# Altium PCB BCM_ECU_revA_V3.PcbDoc (part 2 of 7)
Units mm, origin at the board's own origin, x right, y up, seen from the top; angles counter-clockwise.
Board outline 109.5 x 156 mm, 4 copper layers (TOP SIG, GND, PWR, BOT SIG), stack 0.603 mm thick; 580 components, 446 nets, 1965 pads, 870 vias.
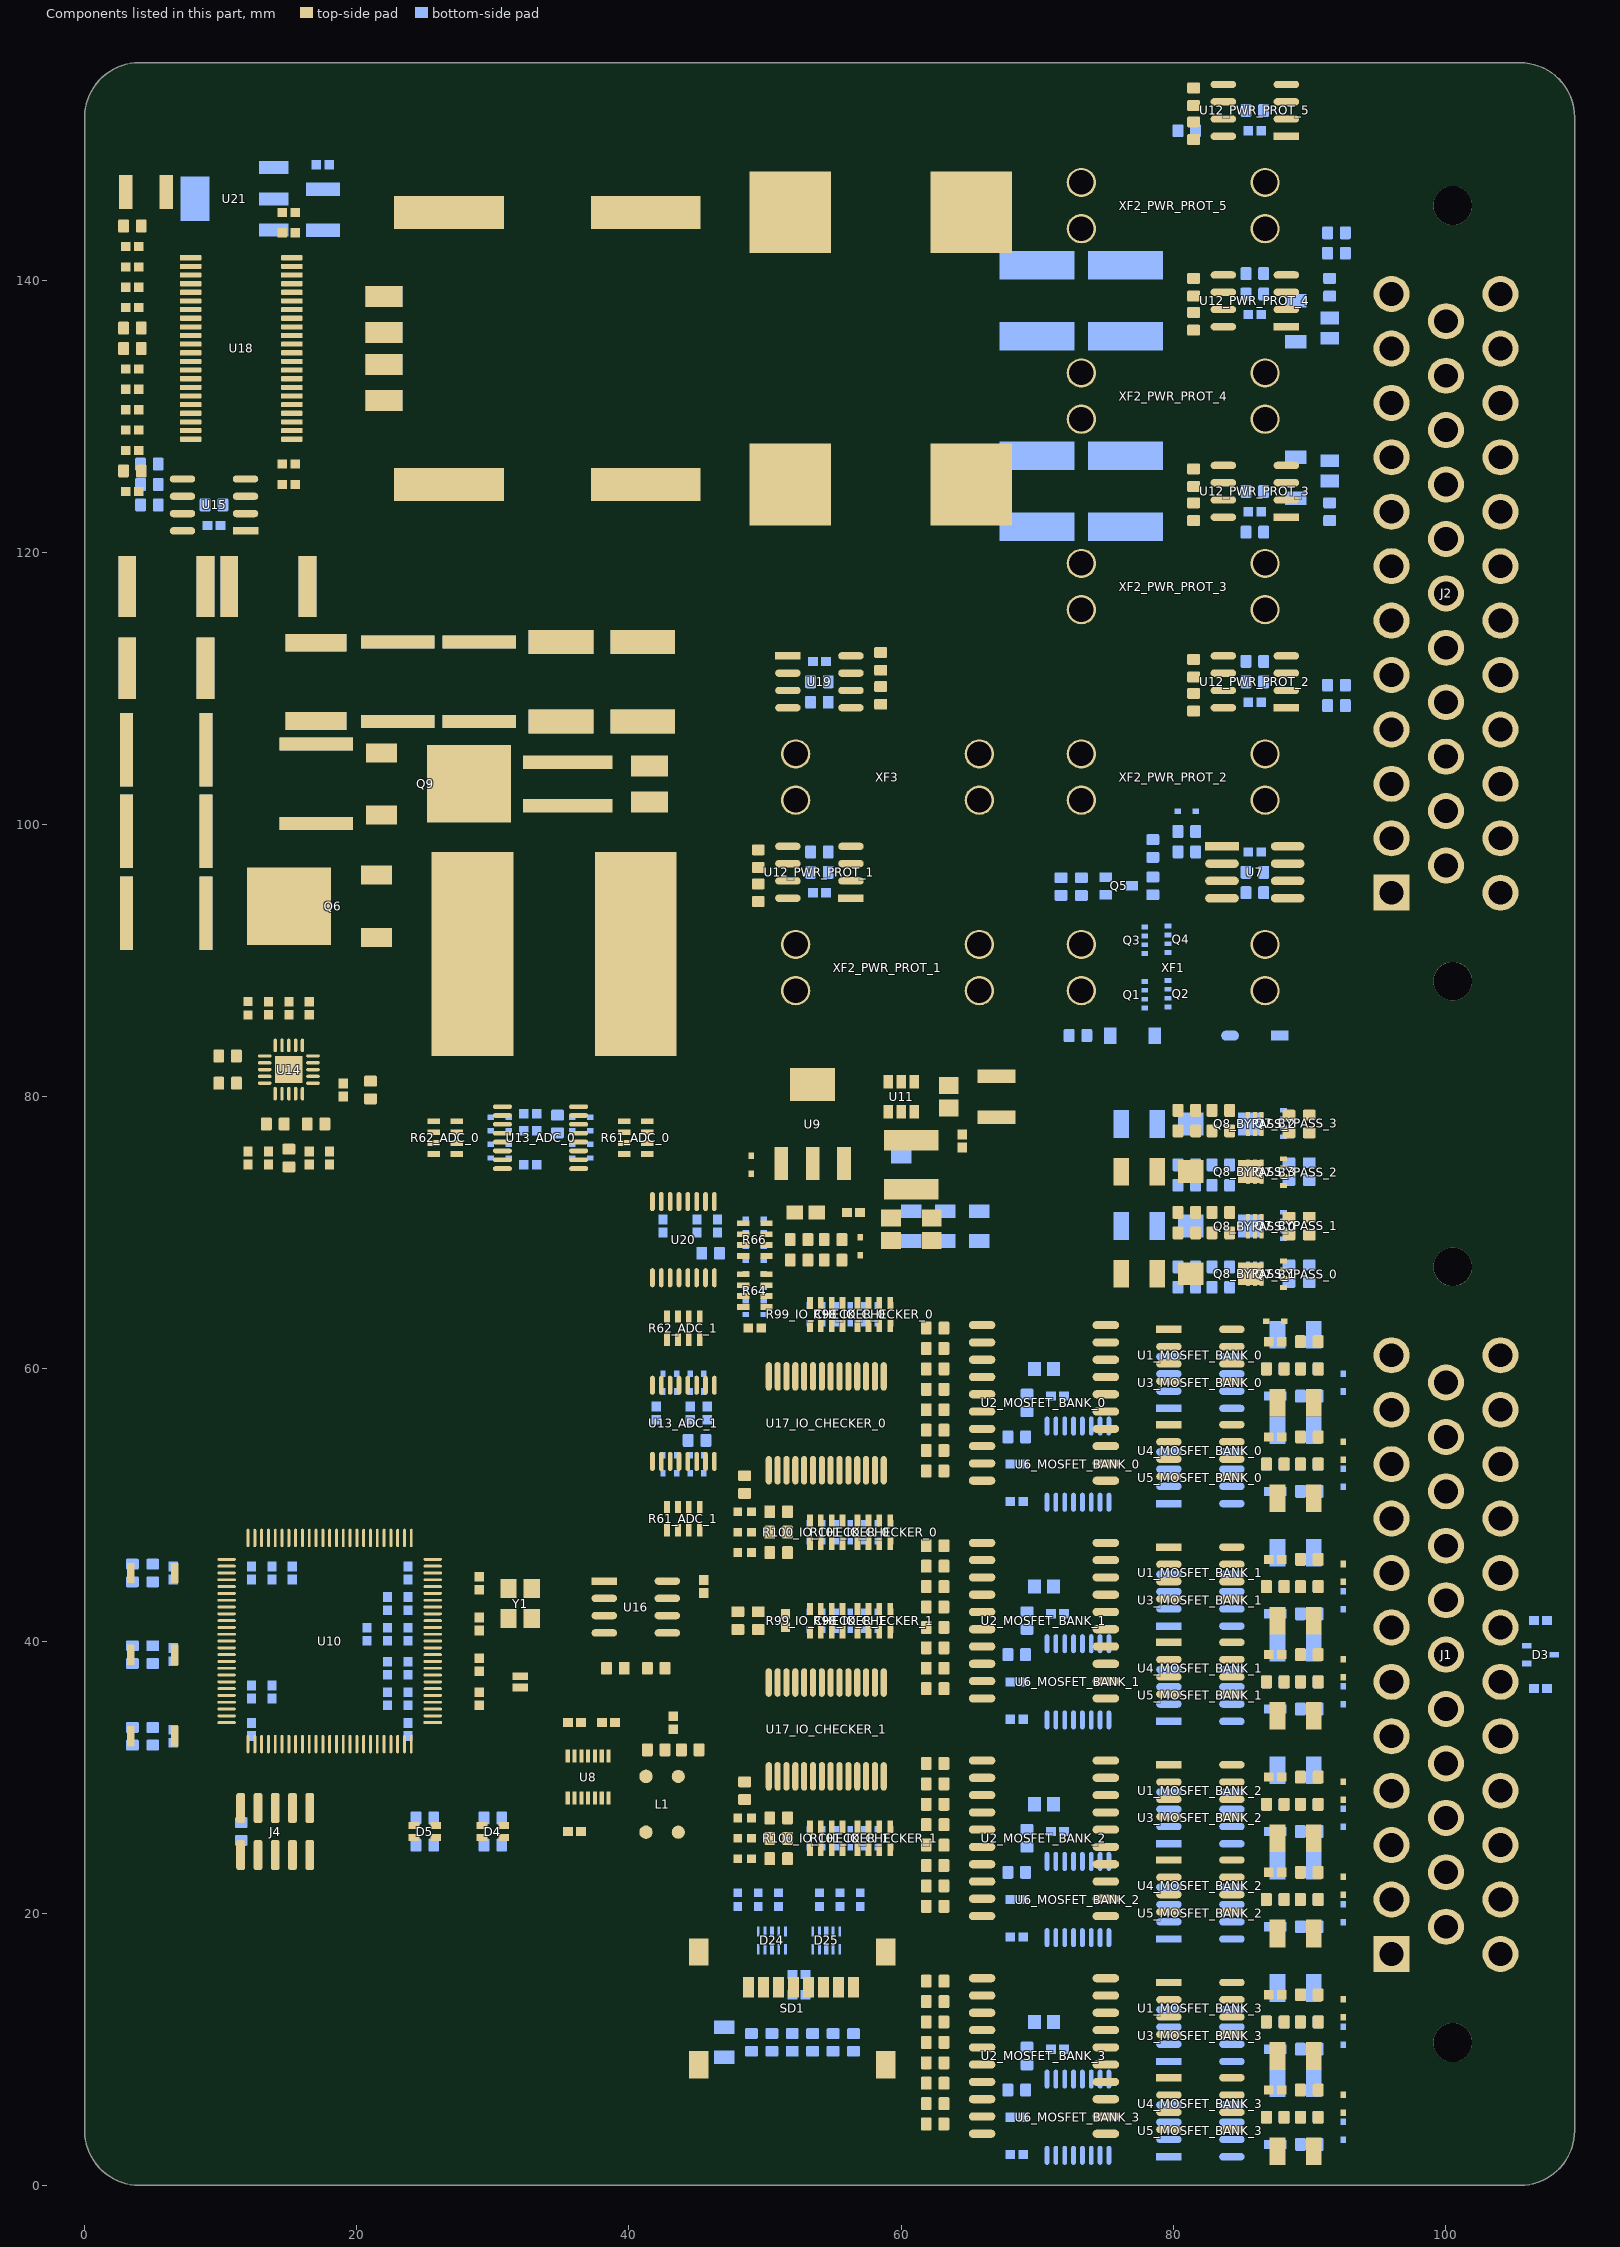
[diagram p4: the components of this part, seen from the top]

## Components (designator, comment, footprint, x,y, rotation, side; value= is the part's Value field where it differs from the comment) (continued)
R100_IO_CHECKER_1 "CAY16-102J4LF" BOUR-CAY16-J4_V 54.5,25.5 r90 top (schematic designator R100)
R101_IO_CHECKER_0 "CAY16-102J4LF" BOUR-CAY16-J4_V 58,48 r90 top (schematic designator R101)
R101_IO_CHECKER_1 "CAY16-102J4LF" BOUR-CAY16-J4_V 58,25.5 r90 top (schematic designator R101)
R102_IO_CHECKER_0 "DNP" RESC1005X40X25ML05T05 48.5,49.5 r0 top (schematic designator R102)
R102_IO_CHECKER_1 "DNP" RESC1005X40X25ML05T05 48.5,27 r0 top (schematic designator R102)
R103_IO_CHECKER_0 "DNP" RESC1005X40X25ML05T05 48.5,48 r0 top (schematic designator R103)
R103_IO_CHECKER_1 "DNP" RESC1005X40X25ML05T05 48.5,25.5 r0 top (schematic designator R103)
R104_IO_CHECKER_0 "DNP" RESC1005X40X25ML05T05 48.5,46.5 r0 top (schematic designator R104)
R104_IO_CHECKER_1 "DNP" RESC1005X40X25ML05T05 48.5,24 r0 top (schematic designator R104)
R105 "100k" R0603B 4.75,126.5 r180 bottom value=330
R106 "5.1k" R0603B 4.75,125 r0 bottom value=330
R107 "DNP" R0603B 54,110.5 r0 bottom value=10k
R108 "1k" R0603B 54,109 r0 bottom
R109 "100k" R0603B 58.5,112 r270 top value=10k
R110 "24k" R0603B 58.5,109.5 r270 top value=2.7k
R111 "1k" R0603B 4.75,123.5 r0 bottom
R112 "0402 JUMPER" RESC1005X40X25ML05T05 55.5,21 r270 bottom
R113 "0402 JUMPER" RESC1005X40X25ML05T05 57,21 r270 bottom
R114 "0402 JUMPER" RESC1005X40X25ML05T05 48,21 r270 bottom
R115 "0402 JUMPER" RESC1005X40X25ML05T05 49.5,21 r270 bottom
R116 "100k" R0603B 53.5,10.5 r270 bottom value=10k
R117 "0402 JUMPER" RESC1005X40X25ML05T05 54,21 r270 bottom
R118 "0402 JUMPER" RESC1005X40X25ML05T05 51,21 r270 bottom
R119 "100k" R0603B 52,10.5 r270 bottom value=10k
R120 "100k" R0603B 55,10.5 r270 bottom value=10k
R121_IO_CHECKER_0 "100k" R0603B 48.5,51.5 r270 top (schematic designator R121)
R121_IO_CHECKER_1 "100k" R0603B 48.5,29 r270 top (schematic designator R121)
R122 "100k" R0603B 56.5,10.5 r270 bottom value=10k
R123 "100k" R0603B 49,10.5 r270 bottom value=10k
R124 "100k" R0603B 50.5,10.5 r270 bottom value=10k
R125 "100k" R0603B 52.5,69.5 r180 top
R126 "100k" R0603B 52.5,68 r0 top
R130 "3.3" R0603B 91.5,139.5 r270 bottom value=100k
R131 "3.3" R0603B 91.5,123 r90 bottom value=100k
R132 "30k" R0603B 3.5,135 r180 top value=100k
R133 "22k" R0603B 3.5,136.5 r180 top value=100k
R134 "3.3" R0603B 3.5,144 r0 top value=100k
R135 "3.3" R0603B 3.5,126 r0 top value=100k
SD1 "47219-2001" MOLX-47219-2001-8_V 52,13 r0 top
SW1 "KXT331LHS" FP-KXT331LHS-MFG 5,45 r0 top
SW2 "KXT331LHS" FP-KXT331LHS-MFG 5,39 r180 top
SW3 "KXT331LHS" FP-KXT331LHS-MFG 5,33 r180 top
U1_MOSFET_BANK_0 "ACS711KLCTR-12AB-T" FP-LC-8-IPC_C 82,61 r0 top (schematic designator U1)
U1_MOSFET_BANK_1 "ACS711KLCTR-12AB-T" FP-LC-8-IPC_C 82,45 r0 top (schematic designator U1)
U1_MOSFET_BANK_2 "ACS711KLCTR-12AB-T" FP-LC-8-IPC_C 82,29 r0 top (schematic designator U1)
U1_MOSFET_BANK_3 "ACS711KLCTR-12AB-T" FP-LC-8-IPC_C 82,13 r0 top (schematic designator U1)
U2_MOSFET_BANK_0 "ITS716G" INF-PG-DSO-20-32_L 70.5,57.5 r0 top (schematic designator U2)
U2_MOSFET_BANK_1 "ITS716G" INF-PG-DSO-20-32_L 70.5,41.5 r0 top (schematic designator U2)
U2_MOSFET_BANK_2 "ITS716G" INF-PG-DSO-20-32_L 70.5,25.5 r0 top (schematic designator U2)
U2_MOSFET_BANK_3 "ITS716G" INF-PG-DSO-20-32_L 70.5,9.5 r0 top (schematic designator U2)
U3_MOSFET_BANK_0 "ACS711KLCTR-12AB-T" FP-LC-8-IPC_C 82,59 r0 bottom (schematic designator U3)
U3_MOSFET_BANK_1 "ACS711KLCTR-12AB-T" FP-LC-8-IPC_C 82,43 r0 bottom (schematic designator U3)
U3_MOSFET_BANK_2 "ACS711KLCTR-12AB-T" FP-LC-8-IPC_C 82,27 r0 bottom (schematic designator U3)
U3_MOSFET_BANK_3 "ACS711KLCTR-12AB-T" FP-LC-8-IPC_C 82,11 r0 bottom (schematic designator U3)
U4_MOSFET_BANK_0 "ACS711KLCTR-12AB-T" FP-LC-8-IPC_C 82,54 r0 top (schematic designator U4)
U4_MOSFET_BANK_1 "ACS711KLCTR-12AB-T" FP-LC-8-IPC_C 82,38 r0 top (schematic designator U4)
U4_MOSFET_BANK_2 "ACS711KLCTR-12AB-T" FP-LC-8-IPC_C 82,22 r0 top (schematic designator U4)
U4_MOSFET_BANK_3 "ACS711KLCTR-12AB-T" FP-LC-8-IPC_C 82,6 r0 top (schematic designator U4)
U5_MOSFET_BANK_0 "ACS711KLCTR-12AB-T" FP-LC-8-IPC_C 82,52 r0 bottom (schematic designator U5)
U5_MOSFET_BANK_1 "ACS711KLCTR-12AB-T" FP-LC-8-IPC_C 82,36 r0 bottom (schematic designator U5)
U5_MOSFET_BANK_2 "ACS711KLCTR-12AB-T" FP-LC-8-IPC_C 82,20 r0 bottom (schematic designator U5)
U5_MOSFET_BANK_3 "ACS711KLCTR-12AB-T" FP-LC-8-IPC_C 82,4 r0 bottom (schematic designator U5)
U6_MOSFET_BANK_0 "ADC088S022CIMT/NOPB" MTC16_L 73,53 r270 bottom (schematic designator U6)
U6_MOSFET_BANK_1 "ADC088S022CIMT/NOPB" MTC16_L 73,37 r270 bottom (schematic designator U6)
U6_MOSFET_BANK_2 "ADC088S022CIMT/NOPB" MTC16_L 73,21 r270 bottom (schematic designator U6)
U6_MOSFET_BANK_3 "ADC088S022CIMT/NOPB" MTC16_L 73,5 r270 bottom (schematic designator U6)
U7 "ACS711KLCTR-25AB-T" FP-LC-8-IPC_A 86,96.5 r0 top
U8 "TCAN1146DYYRQ1" TCAN1146DYYRQ1-Footprint-1 37,30 r270 top
U9 "LD1117S50CTR" SOT-223_N 53.5,78 r90 top
U10 "STM32H730VBT6" FP-LQFP100-1L-IPC_C 18,40 r180 top
U11 "AP63203WU-7" FP-TSOT26-MFG 60,80 r270 top
U12_PWR_PROT_1 "ACS711KLCTR-12AB-T" FP-LC-8-IPC_C 54,96.5 r180 top (schematic designator U12)
U12_PWR_PROT_2 "ACS711KLCTR-12AB-T" FP-LC-8-IPC_C 86,110.5 r180 top (schematic designator U12)
U12_PWR_PROT_3 "ACS711KLCTR-12AB-T" FP-LC-8-IPC_C 86,124.5 r180 top (schematic designator U12)
U12_PWR_PROT_4 "ACS711KLCTR-12AB-T" FP-LC-8-IPC_C 86,138.5 r180 top (schematic designator U12)
U12_PWR_PROT_5 "ACS711KLCTR-12AB-T" FP-LC-8-IPC_C 86,152.5 r180 top (schematic designator U12)
U13_ADC_0 "ADC088S022CIMT/NOPB" MTC16_L 33.5,77 r180 top (schematic designator U13)
U13_ADC_1 "ADC088S022CIMT/NOPB" MTC16_L 44,56 r90 top (schematic designator U13)
U14 "LM51231QRGRRQ1" QFN50P350X350X100_HS-21N 15,82 r180 top
U15 "ACS711KLCTR-12AB-T" FP-LC-8-IPC_C 9.5,123.5 r180 top
U16 "CAT25256VI-GT3" FP-CAT25256VI-GT3-IPC_C 40.5,42.5 r0 top
U17_IO_CHECKER_0 "MCP23017-E/SS" SSOP-SS28_N 54.5,56 r270 top (schematic designator U17)
U17_IO_CHECKER_1 "MCP23017-E/SS" SSOP-SS28_N 54.5,33.5 r270 top (schematic designator U17)
U18 "TPA3255DDVR" TPA3255DDVR-Footprint-1 11.5,135 r0 top
U19 "ACS711KLCTR-12AB-T" FP-LC-8-IPC_C 54,110.5 r0 top
U20 "ADC088S022CIMT/NOPB" MTC16_L 44,69.5 r90 top
U21 "LM2937IMP-12/NOPB" FP-DCY0004A-MFG 11,146 r180 bottom
XF1 "3557-2" KSTN-3557-2 80,89.5 r180 top
XF2_PWR_PROT_1 "3557-2" KSTN-3557-2 59,89.5 r180 top (schematic designator XF2)
XF2_PWR_PROT_2 "3557-2" KSTN-3557-2 80,103.5 r0 top (schematic designator XF2)
XF2_PWR_PROT_3 "3557-2" KSTN-3557-2 80,117.5 r0 top (schematic designator XF2)
XF2_PWR_PROT_4 "3557-2" KSTN-3557-2 80,131.5 r0 top (schematic designator XF2)
XF2_PWR_PROT_5 "3557-2" KSTN-3557-2 80,145.5 r0 top (schematic designator XF2)
XF3 "3557-2" KSTN-3557-2 59,103.5 r180 top
Y1 "ABM8G-25.000MHZ-18-D2Y-T" FP-ABM8G-MFG 32,42.75 r270 top
Y2 "ECS-.327-12.5-1210-TR" FP-ECX-1210-MFG 32,37 r90 top

## Footprints (in the part's own frame and the unit in brackets; to place one, negate y for a bottom-side part, rotate by r counter-clockwise, add the part's x,y. Pads: shape width x height; smd on the part's side, far side on the other; paste and mask are expansions set on the pad)
0ZCH0075AF2E-Footprint-1 [mil]
  rect 39x110 smd paste+0 mask+0: 1(-59,0) 2(59,0)
  silkscreen extent -27,-60 27,60, body extent -67,-55 67,55, height 47
3220-10-0300-00-Footprint-1 [mm]
  rrect50% 2.2x0.65 smd: 1(-1.73,2.54) 2(1.73,2.54) 3(-1.73,1.27) 4(1.73,1.27) 5(-1.73,0) 6(1.73,0) 7(-1.73,-1.27) 8(1.73,-1.27) 9(-1.73,-2.54) 10(1.73,-2.54)
  silkscreen extent -2.5,-6.35 2.5,6.35, body extent -2.74,-6.39 2.76,6.31, height 5.22
BOUR-CAY16-J4_V [mm] "SMD, 8-Leads, Body 1.6x3.2mm, Pitch 0.8mm"
  rect 0.9x0.425 smd: 1(-0.85,1.2) 2(-0.85,0.4) 3(-0.85,-0.4) 4(-0.85,-1.2) 5(0.85,-1.2) 6(0.85,-0.4) 7(0.85,0.4) 8(0.85,1.2)
  silkscreen extent -1.97,1.08 -1.73,1.32, body extent -0.8,-1.6 0.8,1.6, height 0.6
CAF-50P250X100-10N [mm] "Chip Array, Flat, 10-Leads, Pitch 0.50mm,  Body 2.50x1.00mm,  IPC Medium Density"
  rect 0.75x0.2 smd: 1(-0.65,1) 2(-0.65,0.5) 4(-0.65,-0.5) 5(-0.65,-1) 6(0.65,-1) 7(0.65,-0.5) 9(0.65,0.5) 10(0.65,1)
  rect 0.75x0.3 smd: 3(-0.65,0) 8(0.65,0)
  silkscreen extent -1.01,1.11 -0.91,1.21, body extent -0.55,-1.3 0.55,1.3, height 1
DIOD-SOT323-3_V [mm] "SOT323, 3-Leads, Body 2.2x1.35mm, Pitch 0.65mm"
  rect 0.9x0.7 smd: 1(-0.95,0.65) 2(-0.95,-0.65) 3(0.95,0)
  silkscreen extent -1.07,-1.1 0.67,1.67, body extent -1.1,-1.1 1.1,1.1, height 1.07
FP-0402-L_1_0_0_05-W_0_5-IPC_A [mm]
  rect 0.715x0.672 smd paste+0 mask+0: 1(-0.479,0) 2(0.479,0)
  silkscreen extent -0.84,-0.74 0.84,0.74, body extent -1.04,-0.54 1.04,0.54, height 0.25
FP-0466-MFG [mil]
  rect 45x80 smd paste+0 mask+0: 1(-52.5,0) 2(52.5,0)
  silkscreen extent -15,-32 15,32, body extent -79,-44 79,44, height 10
FP-1206-L_3_2_0_2-W_1_6_0-MFG [mm]
  rect 1x1.6 smd paste+0 mask+0: 1(-1.5,0) 2(1.5,0)
  silkscreen extent -0.63,-0.9 0.63,0.9, body extent -1.6,-0.8 1.6,0.8, height 0.94
FP-1210-L_3_2_0_3-W_2_5_0-IPC_B [mm]
  rect 1.553x2.706 smd paste+0 mask+0: 1(-1.325,0) 2(1.325,0)
  silkscreen extent -0.25,-1.35 0.25,1.35, body extent -2.35,-1.6 2.35,1.6, height 0.25
FP-1210-L_3_3_0_4-W_2_5_0-MFG [mm]
  rect 1x2.5 smd paste+0 mask+0: 1(-1.5,0) 2(1.5,0)
  silkscreen extent -0.62,-1.4 0.62,1.4, body extent -2.1,-1.5 2.1,1.5, height 0.25
FP-2220-L_5_7_0_5-W_5_0_4-IPC_A [mm]
  rect 2.082x5.503 smd paste+0 mask+0: 1(-2.61,0) 2(2.61,0)
  silkscreen extent -1.27,-2.75 1.27,2.75, body extent -2.85,-2.5 2.85,2.5, height 2.29
FP-776163-1-MFG [mm]
  rect 2.65x2.65 hole 1.75 paste-2539.97 mask+0: 1(-22,16.95)
  round 2.65 hole 1.75 paste-2539.97 mask+0: 2(-18,16.95) 3(-14,16.95) 4(-10,16.95) 5(-6,16.95) 6(-2,16.95) 7(2,16.95) 8(6,16.95) 9(10,16.95) 10(14,16.95) 11(18,16.95) 12(22,16.95) 13(-20,12.95) 14(-16,12.95) 15(-12,12.95) 16(-8,12.95) 17(-4,12.95) 18(0,12.95) 19(4,12.95) 20(8,12.95) 21(12,12.95) 22(16,12.95) 23(20,12.95) 24(-22,8.95) 25(-18,8.95) 26(-14,8.95) 27(-10,8.95) 28(-6,8.95) 29(-2,8.95) 30(2,8.95) 31(6,8.95) 32(10,8.95) 33(14,8.95) 34(18,8.95) 35(22,8.95)
  round 2.85 hole 2.85 unplated paste-2539.97 mask+0: ""(-28.5,12.45) ""(28.5,12.45)
  silkscreen extent -39.17,4.1 38.55,19.15, body extent -38.65,-19.25 38.65,19.25, height 0.25
FP-ABM8G-MFG [mm]
  rect 1.4x1.2 smd paste+0 mask+0: 1(-1.1,-0.85) 2(1.1,-0.85) 3(1.1,0.85) 4(-1.1,0.85)
  silkscreen extent -2.47,-1.83 1.6,1.83, body extent -1.9,-1.55 1.9,1.55, height 0.25
FP-BLM15-0_05-IPC_A [mm]
  rect 0.715x0.672 smd paste+0 mask+0: 1(-0.479,0) 2(0.479,0)
  silkscreen extent -0.84,-0.74 0.84,0.74, body extent -0.5,-0.25 0.5,0.25, height 0.55
FP-C0805C-DN-MFG [mm]
  rect 0.95x1.35 smd paste+0 mask+0: 1(-0.75,0) 2(0.75,0)
  silkscreen extent -1.1,-1.07 1.1,1.07, body extent -1,-0.63 1,0.63, height 0.88
FP-C5750-230-0_4-MFG [mm]
  rect 1.3x4.5 smd paste+0 mask+0: 1(-2.875,0) 2(2.875,0)
  silkscreen extent -3.05,-2.7 3.05,2.7, body extent -2.85,-2.5 2.85,2.5, height 2.5
FP-CAT25256VI-GT3-IPC_C [mm]
  rect 1.874x0.545 smd paste+0 mask+0: 1(-2.316,1.905)
  rrect100% 1.874x0.545 smd paste+0 mask+0: 2(-2.316,0.635) 3(-2.316,-0.635) 4(-2.316,-1.905) 5(2.316,-1.905) 6(2.316,-0.635) 7(2.316,0.635) 8(2.316,1.905)
  silkscreen extent -4.25,-2.45 0.88,2.45, body extent -3.35,-2.55 3.35,2.55, height 0.25
FP-CGA9P-IPC_B [mm]
  rect 0.953x5.403 smd paste+0 mask+0: 1(-2.925,0) 2(2.925,0)
  silkscreen extent -2.15,-2.7 2.15,2.7, body extent -3.65,-2.95 3.65,2.95, height 0.25
FP-CKG57N-MFG [mm]
  rect 1.75x4.75 smd paste+0 mask+0: 1(-2.925,0) 2(2.925,0)
  silkscreen extent -1.68,-2.75 1.68,2.75, body extent -3.9,-2.85 3.9,2.85, height 0.25
FP-DCY0004A-MFG [mm]
  rect 2.15x0.95 smd paste+0 mask+0: 1(-2.9,2.3) 2(-2.9,0) 3(-2.9,-2.3)
  rect 2.15x3.25 smd paste+0 mask+0: 4(2.9,0)
  silkscreen extent -4.7,-3.35 1.85,3.35, body extent -3.5,-3.25 3.5,3.25, height 1.8
FP-ECX-1210-MFG [mm]
  rect 0.575x1.14 smd paste+0 mask+0: 1(-0.413,0) 2(0.413,0)
  silkscreen extent -0.65,-0.95 0.65,0.95, body extent -0.8,-0.67 0.8,0.67, height 0.25
FP-GRM21B-0_2-e0_2_0_7-IPC_B [mm]
  rect 1.255x1.456 smd paste+0 mask+0: 1(-0.826,0) 2(0.826,0)
  silkscreen extent -1.45,-1.13 1.45,1.13, body extent -1.7,-0.98 1.7,0.98, height 0.25
FP-GRM188-0_1-e0_2_0_55-IPC_A [mm]
  rect 1.208x1.012 smd paste+0 mask+0: 1(-0.802,0) 2(0.802,0)
  silkscreen extent -1.41,-0.91 1.41,0.91, body extent -1.91,-1.01 1.91,1.01, height 0.25
FP-KRL6432E-MFG [mm]
  rect 1x6.6 smd paste+0 mask+0: 1(-1.6,0) 2(1.6,0)
  silkscreen extent -0.72,-3.25 0.72,3.25, body extent -2.2,-3.4 2.2,3.4, height 0.25
FP-KXT331LHS-MFG [mm]
  rect 0.55x1.5 smd paste+0 mask+0: 1(-1.625,0) 2(1.625,0)
  silkscreen extent -1.65,-1.15 1.65,1.15, body extent -2,-1.25 2,1.25, height 0.25
FP-LC-8-IPC_A [mm]
  rect 2.474x0.622 smd paste+0 mask+0: 1(-2.416,1.905)
  rrect100% 2.474x0.622 smd paste+0 mask+0: 2(-2.416,0.635) 3(-2.416,-0.635) 4(-2.416,-1.905) 5(2.416,-1.905) 6(2.416,-0.635) 7(2.416,0.635) 8(2.416,1.905)
  silkscreen extent -4.37,-2.45 0.68,2.45, body extent -3,-2.45 3,2.45, height 1.75
FP-LC-8-IPC_C [mm]
  rect 1.874x0.542 smd paste+0 mask+0: 1(-2.316,1.905)
  rrect100% 1.874x0.542 smd paste+0 mask+0: 2(-2.316,0.635) 3(-2.316,-0.635) 4(-2.316,-1.905) 5(2.316,-1.905) 6(2.316,-0.635) 7(2.316,0.635) 8(2.316,1.905)
  silkscreen extent -3.97,-2.45 0.88,2.45, body extent -3.35,-2.55 3.35,2.55, height 0.25
FP-LQFP100-1L-IPC_C [mm]
  rect 1.355x0.212 smd paste+0 mask+0: 1(-7.575,6)
  rrect100% 1.355x0.212 smd paste+0 mask+0: 2(-7.575,5.5) 3(-7.575,5) 4(-7.575,4.5) 5(-7.575,4) 6(-7.575,3.5) 7(-7.575,3) 8(-7.575,2.5) 9(-7.575,2) 10(-7.575,1.5) 11(-7.575,1) 12(-7.575,0.5) 13(-7.575,0) 14(-7.575,-0.5) 15(-7.575,-1) 16(-7.575,-1.5) 17(-7.575,-2) 18(-7.575,-2.5) 19(-7.575,-3) 20(-7.575,-3.5) 21(-7.575,-4) 22(-7.575,-4.5) 23(-7.575,-5) 24(-7.575,-5.5) 25(-7.575,-6) 51(7.575,-6) 52(7.575,-5.5) 53(7.575,-5) 54(7.575,-4.5) 55(7.575,-4) 56(7.575,-3.5) 57(7.575,-3) 58(7.575,-2.5) 59(7.575,-2) 60(7.575,-1.5) 61(7.575,-1) 62(7.575,-0.5) 63(7.575,0) 64(7.575,0.5) 65(7.575,1) 66(7.575,1.5) 67(7.575,2) 68(7.575,2.5) 69(7.575,3) 70(7.575,3.5) 71(7.575,4) 72(7.575,4.5) 73(7.575,5) 74(7.575,5.5) 75(7.575,6)
  rrect100% 0.212x1.355 smd paste+0 mask+0: 26(-6,-7.575) 27(-5.5,-7.575) 28(-5,-7.575) 29(-4.5,-7.575) 30(-4,-7.575) 31(-3.5,-7.575) 32(-3,-7.575) 33(-2.5,-7.575) 34(-2,-7.575) 35(-1.5,-7.575) 36(-1,-7.575) 37(-0.5,-7.575) 38(0,-7.575) 39(0.5,-7.575) 40(1,-7.575) 41(1.5,-7.575) 42(2,-7.575) 43(2.5,-7.575) 44(3,-7.575) 45(3.5,-7.575) 46(4,-7.575) 47(4.5,-7.575) 48(5,-7.575) 49(5.5,-7.575) 50(6,-7.575) 76(6,7.575) 77(5.5,7.575) 78(5,7.575) 79(4.5,7.575) 80(4,7.575) 81(3.5,7.575) 82(3,7.575) 83(2.5,7.575) 84(2,7.575) 85(1.5,7.575) 86(1,7.575) 87(0.5,7.575) 88(0,7.575) 89(-0.5,7.575) 90(-1,7.575) 91(-1.5,7.575) 92(-2,7.575) 93(-2.5,7.575) 94(-3,7.575) 95(-3.5,7.575) 96(-4,7.575) 97(-4.5,7.575) 98(-5,7.575) 99(-5.5,7.575) 100(-6,7.575)
  silkscreen extent -7.7,-6.25 6.25,6.83, body extent -8.35,-8.35 8.35,8.35, height 0.25
FP-MF-PSMF-MFG [mm]
  rect 1x1.5 smd paste+0 mask+0: 1(-1.1,0) 2(1.1,0)
  silkscreen extent -0.23,-0.75 0.23,0.75, body extent -1.07,-0.67 1.07,0.67, height 0.85
FP-NR5040-H_4_1-MFG [mm]
  rect 1.5x4 smd paste+0 mask+0: 1(-1.8,0) 2(1.8,0)
  silkscreen extent -2.55,-2.55 2.55,2.55, body extent -2.65,-2.65 2.65,2.65, height 0.25
FP-SOD-123-IPC_A [mm]
  rect 1.308x0.762 smd paste+0 mask+0: 1(-1.825,0)
  rrect100% 1.308x0.762 smd paste+0 mask+0: 2(1.825,0)
  silkscreen extent -2.39,-0.8 1.35,1.01, body extent -1.85,-0.8 1.85,0.8, height 1.35
FP-SON6-P-0_50-MFG [mm]
  rect 0.3x0.45 smd paste+0 mask+0: 1(-0.5,-0.675) 2(0,-0.675) 3(0.5,-0.675) 4(0.5,0.675) 5(0,0.675) 6(-0.5,0.675)
  silkscreen extent -0.82,-1.57 0.82,0.08, body extent -0.92,-1 0.92,1, height 0.25
FP-SOT323-3L-MFG [mm]
  rect 0.7x0.42 smd paste+0 mask+0: 1(-1,0.65) 2(-1,-0.65) 3(1,0)
  silkscreen extent -0.67,-1.1 0.67,1.1, body extent -1.05,-1 1.05,1, height 1.1
FP-SRF4532-MFG [mm]
  round 0.99 smd paste+0 mask+0: 1(-2.05,-1.25) 2(2.05,-1.25)
  round 0.97 smd paste+0 mask+0: 3(2.05,1.125) 4(-2.05,1.125)
  TOP SIG region: -2.6,0.45 -2.6,1.8 -1.5,1.8 -1.5,0.95 -1.9,0.45
  TOP SIG region: -2.6,-1.8 -2.6,-0.45 -1.9,-0.45 -1.5,-0.95 -1.5,-1.8
  TOP SIG region: 1.5,1.8 2.6,1.8 2.6,0.45 1.9,0.45 1.5,0.95
  TOP SIG region: 1.5,-1.8 1.5,-0.95 1.9,-0.45 2.6,-0.45 2.6,-1.8
  silkscreen extent -2.17,-2.47 1.12,1.7, body extent -2.7,-1.9 2.7,1.9, height 0.25
FP-T16-0236-MFG [mil]
  rect 55x90 smd paste+0 mask+0: 1(-90,-165) 3(90,-165)
  rect 224.02x243.31 smd paste+0 mask+0: 4(0,88.35)
  silkscreen extent -132,-90 132,155, body extent -136,-214 136,214, height 10
FP-TSOT26-MFG [mm]
  rect 1x0.7 smd paste+0 mask+0: 1(-1.099,0.95) 2(-1.099,0) 3(-1.099,-0.95) 4(1.099,-0.95) 5(1.099,0) 6(1.099,0.95)
  silkscreen extent -2.32,-1.5 0.22,1.5, body extent -1.7,-1.6 1.7,1.6, height 0.25
INF-PG-DSO-20-32_L [mm] "SOP, 20-Leads, Body 12.7x7.5mm, Pitch 1.27mm, IPC High Density"
  oval 1.95x0.6 smd: 1(-4.55,5.715) 2(-4.55,4.445) 3(-4.55,3.175) 4(-4.55,1.905) 5(-4.55,0.635) 6(-4.55,-0.635) 7(-4.55,-1.905) 8(-4.55,-3.175) 9(-4.55,-4.445) 10(-4.55,-5.715) 11(4.55,-5.715) 12(4.55,-4.445) 13(4.55,-3.175) 14(4.55,-1.905) 15(4.55,-0.635) 16(4.55,0.635) 17(4.55,1.905) 18(4.55,3.175) 19(4.55,4.445) 20(4.55,5.715)
  silkscreen extent -4.67,-6.4 3.17,6.69, body extent -3.8,-6.4 3.8,6.4, height 2.65
KSTN-3557-2 [mm] "Fuse Holder, PCB Mount, Thru-Hole, Body 19.8x6.8mm, Height 7.4mm"
  round 2.15 hole 1.8: 1(-6.75,1.7) 2(-6.75,-1.7) 3(6.75,1.7) 4(6.75,-1.7)
  silkscreen extent -9.9,-3.4 9.9,4.12, body extent -9.91,-3.37 9.91,3.37, height 7.74
MAL215099913E3-Footprint-1 [mm]
  rect 8.06x2.41 smd: 1(-7.225,0) 2(7.225,0)
  silkscreen extent -10.35,-9.5 9.5,9.5, body extent -10.5,-9.5 10.5,9.5, height 22
MOLX-47219-2001-8_V [mm] "CONN, 8-Leads, Body 14.5x13.6mm, Pitch 1.1mm"
  rect 0.8x1.5 smd: 1(-3.205,1.55) 2(-2.105,1.55) 3(-1.005,1.55) 4(0.095,1.55) 5(1.195,1.55) 6(2.295,1.55) 7(3.395,1.55) 8(4.495,1.55)
  rect 1.45x2 smd: 9(6.875,4.15) 10(6.875,-4.15) 11(-6.875,-4.15) 12(-6.875,4.15)
  silkscreen extent -6.8,-7.8 6.8,7.42, body extent -7.3,-7.79 7.3,6.71, height 1.91
MTC16_L [mm] "TSOP, 16-Leads, Body 5x4.4mm, Pitch 0.65mm, IPC High Density"
  oval 1.4x0.35 smd: 1(-2.8,2.275) 2(-2.8,1.625) 3(-2.8,0.975) 4(-2.8,0.325) 5(-2.8,-0.325) 6(-2.8,-0.975) 7(-2.8,-1.625) 8(-2.8,-2.275) 9(2.8,-2.275) 10(2.8,-1.625) 11(2.8,-0.975) 12(2.8,-0.325) 13(2.8,0.325) 14(2.8,0.975) 15(2.8,1.625) 16(2.8,2.275)
  silkscreen extent -2.92,-2.55 1.7,3.12, body extent -2.25,-2.55 2.25,2.55, height 1.1
ONSC-SOD-123-2-425-04_V [mm] "SOD, 2-Leads, Body 2.69x1.6mm"
  rect 0.91x1.22 smd: 1(-1.635,0) 2(1.635,0)
  silkscreen extent -1.76,-0.8 0.78,1.28, body extent -1.35,-0.8 1.35,0.8, height 1.35
ONSC-SOD-523-2-502-01_V [mm] "SOD, 2-Leads, Body 1.2x0.8mm"
  rect 0.48x0.4 smd: 1(-0.66,0) 2(0.66,0)
  silkscreen extent -0.75,-0.4 0.07,0.65, body extent -0.6,-0.4 0.6,0.4, height 0.7
PM5433.302NLT-Footprint-1 [mm]
  rect 15x6 / inner rect 0x0 / far side rect 0x0 all layers, no hole: 1(0,6) 2(0,-6)
  body extent -8.25,-7.75 8.25,7.75, height 7.8
QFN50P350X350X100_HS-21N [mm] "QFN, 20-Leads, Body 3.50x3.50mm, Pitch 0.50mm, Thermal Pad 2.00x2.00mm, IPC Medium Density"
  oval 1x0.25 smd: 1(-1.775,1) 2(-1.775,0.5) 3(-1.775,0) 4(-1.775,-0.5) 5(-1.775,-1) 11(1.775,-1) 12(1.775,-0.5) 13(1.775,0) 14(1.775,0.5) 15(1.775,1)
  oval 0.25x1 smd: 6(-1,-1.775) 7(-0.5,-1.775) 8(0,-1.775) 9(0.5,-1.775) 10(1,-1.775) 16(1,1.775) 17(0.5,1.775) 18(0,1.775) 19(-0.5,1.775) 20(-1,1.775)
  rect 2x2 smd: 21(0,0)
  silkscreen extent -2.6,-1.83 1.83,1.83, body extent -1.68,-1.68 1.68,1.68, height 1
R0603B [mm] "Chip Resistor, 0603, 2-Leads, Body 1.58x0.85mm, IPC Medium Density"
  rrect25% 0.8x0.95 smd: 1(-0.65,0) 2(0.65,0)
  silkscreen extent -0.2,-0.7 0.2,0.7, body extent -0.82,-0.48 0.82,0.48, height 0.5
RESC1005X40X25ML05T05 [mm] "Chip Resistor, 2-Leads, Body 1.00x0.50mm, IPC Low Density"
  rect 0.65x0.65 smd: 1(-0.5,0) 2(0.5,0)
  body extent -0.53,-0.27 0.53,0.28, height 0.4
RESC1608X90X30ML15T20 [mm] "Chip Resistor, 2-Leads, Body 1.60x0.80mm, IPC Low Density"
  rect 0.95x1.05 smd: 1(-0.7,0) 2(0.7,0)
  body extent -0.88,-0.48 0.87,0.48, height 0.9
SISH615ADN-T1-GE3-Footprint-1 [mm]
  rect 0.35x0.5 smd paste+0 mask+0: 1(-0.937,-1.4) 2(-0.288,-1.4) 3(0.363,-1.4) 4(1.012,-1.4)
  round 0.025 smd mask+0: 5-6-7-8(0.038,0.51)
  TOP SIG region: -1.187,-0.63 -1.187,-0.215 -1.568,-0.215 -1.568,0.215 -1.187,0.215 -1.187,1.35 -1.137,1.35 -1.137,1.65 -0.737,1.65 -0.737,1.35 -0.487,1.35 -0.487,1.65 -0.088,1.65 -0.088,1.35 0.163,1.35 0.163,1.65 0.563,1.65 0.563,1.35 0.813,1.35 0.813,1.65 1.212,1.65 1.212,1.35 1.262,1.35 1.262,0.215 1.643,0.215 1.643,-0.215 1.262,-0.215 1.262,-0.63
  silkscreen extent -1.51,-2.38 1.59,-1.01, body extent -1.51,-1.6 1.59,1.6, height 0.9
SK34A-LTP-Footprint-1 [mil]
  rect 74x66 smd paste+0 mask+0: 1(-87,0) 2(87,0)
  silkscreen extent -162,-63 99,63
SOT-223_N [mm] "SOT223, 4-Leads, Body 6.5x3.5mm, Pitch 2.3mm, Lead Span 7mm, IPC Medium Density"
  rect 2.4x1 smd: 1(-2.9,2.3) 2(-2.9,0) 3(-2.9,-2.3)
  rect 2.4x3.3 smd: 4(2.9,0)
  silkscreen extent -3.02,-3.35 1.4,3.47, body extent -1.85,-3.35 1.85,3.35, height 1.8
SSOP-SS28_N [mm] "SOP, 28-Leads, Body 10.2x5.2mm, Pitch 0.65mm, IPC Medium Density"
  oval 2.1x0.45 smd: 1(-3.45,4.225) 2(-3.45,3.575) 3(-3.45,2.925) 4(-3.45,2.275) 5(-3.45,1.625) 6(-3.45,0.975) 7(-3.45,0.325) 8(-3.45,-0.325) 9(-3.45,-0.975) 10(-3.45,-1.625) 11(-3.45,-2.275) 12(-3.45,-2.925) 13(-3.45,-3.575) 14(-3.45,-4.225) 15(3.45,-4.225) 16(3.45,-3.575) 17(3.45,-2.925) 18(3.45,-2.275) 19(3.45,-1.625) 20(3.45,-0.975) 21(3.45,-0.325) 22(3.45,0.325) 23(3.45,0.975) 24(3.45,1.625) 25(3.45,2.275) 26(3.45,2.925) 27(3.45,3.575) 28(3.45,4.225)
  silkscreen extent -3.57,-5.25 2,5.25, body extent -2.8,-5.25 2.8,5.25, height 2
TCAN1146DYYRQ1-Footprint-1 [mil]
  rect 38.5x12 smd paste+0 mask+0: 1(-60.75,59.07) 2(-60.75,39.38) 3(-60.75,19.69) 4(-60.75,0) 5(-60.75,-19.69) 6(-60.75,-39.38) 7(-60.75,-59.07) 8(60.75,-59.07) 9(60.75,-39.38) 10(60.75,-19.69) 11(60.75,0) 12(60.75,19.69) 13(60.75,39.38) 14(60.75,59.07)
  silkscreen extent -47,-90 100,90, body extent -66,-84 66,84, height 43
TPA3255DDVR-Footprint-1 [mm]
  rrect25% 1.57x0.38 smd: 1(-3.72,6.667) 2(-3.72,6.032) 3(-3.72,5.397) 4(-3.72,4.763) 5(-3.72,4.127) 6(-3.72,3.492) 7(-3.72,2.857) 8(-3.72,2.222) 9(-3.72,1.587) 10(-3.72,0.953) 11(-3.72,0.318) 12(-3.72,-0.318) 13(-3.72,-0.953) 14(-3.72,-1.587) 15(-3.72,-2.222) 16(-3.72,-2.857) 17(-3.72,-3.492) 18(-3.72,-4.127) 19(-3.72,-4.763) 20(-3.72,-5.397) 21(-3.72,-6.032) 22(-3.72,-6.667) 23(3.72,-6.667) 24(3.72,-6.032) 25(3.72,-5.397) 26(3.72,-4.763) 27(3.72,-4.127) 28(3.72,-3.492) 29(3.72,-2.857) 30(3.72,-2.222) 31(3.72,-1.587) 32(3.72,-0.953) 33(3.72,-0.318) 34(3.72,0.318) 35(3.72,0.953) 36(3.72,1.587) 37(3.72,2.222) 38(3.72,2.857) 39(3.72,3.492) 40(3.72,4.127) 41(3.72,4.763) 42(3.72,5.397) 43(3.72,6.032) 44(3.72,6.667)
  silkscreen extent -5.39,-7.18 3.05,7.18, body extent -4.05,-7 4.05,7, height 1.2
WE-HCI_1890 [mm] "SMT Flat Wire High Current Inductor, body 18.2x18.2mm"
  rect 6x6 smd: 1(0,6.65) 2(0,-6.65)
  silkscreen extent -9.35,-9.35 9.35,9.35, body extent -9.1,-9.15 9.1,9.15, height 8.9
WL-SBCD_0606 [mm] "SMT Bi-color Chip LED Diffuesed, body 1.5x1.6mm"
  rect 0.5x0.8 smd: 1(-0.45,0.8) 2(-0.45,-0.8) 3(0.45,-0.8) 4(0.45,0.8)
  silkscreen extent -0.07,1.48 0.07,1.63, body extent -0.75,-0.8 0.75,0.8, height 0.55

## Part data
C1_MOSFET_BANK_0 C1_MOSFET_BANK_1 C1_MOSFET_BANK_2 C1_MOSFET_BANK_3 C2_MOSFET_BANK_0 C2_MOSFET_BANK_1 C2_MOSFET_BANK_2 C2_MOSFET_BANK_3 C3_MOSFET_BANK_0 C3_MOSFET_BANK_1 C3_MOSFET_BANK_2 C3_MOSFET_BANK_3 C4_MOSFET_BANK_0 C4_MOSFET_BANK_1 C4_MOSFET_BANK_2 C4_MOSFET_BANK_3 C5_MOSFET_BANK_0 C5_MOSFET_BANK_1 C5_MOSFET_BANK_2 C5_MOSFET_BANK_3 C6_MOSFET_BANK_0 C6_MOSFET_BANK_1 C6_MOSFET_BANK_2 C6_MOSFET_BANK_3 C7_MOSFET_BANK_0 C7_MOSFET_BANK_1 C7_MOSFET_BANK_2 C7_MOSFET_BANK_3 C8 C9 C10 C11 C12 C13 C14 C16 C17 C18 C19 C20 C21 C22 C23 C24 C25 C26 C27 C28 C29 C30 C31 C32 C33 C34 C35 C36 C37 C38 C39 C40_PWR_PROT_1 C40_PWR_PROT_2 C40_PWR_PROT_3 C40_PWR_PROT_4 C40_PWR_PROT_5 C42 C43_IO_CHECKER_0 C43_IO_CHECKER_1 C44 C45 C49_ADC_0 C49_ADC_1 C50_ADC_0 C50_ADC_1 C51_ADC_0 C51_ADC_1 C52 C63 C67 C77 C79 C80 C81 C82 C87 C91 C95 C97 C98 C99 C100 C101 C103 C104 C105 C106 C107 C108 C109 C112 C113 C114 C115 C116 C117: library part CMP-001-00058-1, "LARGE PADS, 0402 CAP, CHANGE COMMENT TO MATCH REAL P/N", Capacitor Type=Ceramic, Case/Package=0402, Max Operating Temperature=85°C, Min Operating Temperature=-55°C, Mounting Technology="Surface Mount", Pins=2, RoHS Compliant=Yes
C15: library part CMP-2006-02792-2, "Chip Multilayer Ceramic Capacitors for General Purpose, 0603, 10uF, X5R, 15%, 20%, 6.3V", Capacitance=10uF, Case Code (Imperial)=0603, Case Code (Metric)=1608, Dielectric=X5R, Max Operating Temperature=85°C, Min Operating Temperature=-55°C, Package Quantity=4000, Tolerance=20%, Voltage=6.3V, Case/Package=0603, Depth=0.8mm, Height=0.8mm, Lead Free="Lead Free", Length=1.6mm, Material=Ceramic, Mount="Surface Mount", Packaging="Tape and Reel", Radiation Hardening=No, REACH SVHC="No SVHC", Termination=SMD/SMT, Thickness=0.035inch, Voltage Rating=6.3V, Voltage Rating (DC)=6.3V, Width=0.031inch
C41 C119 C120: library part CMP-2007-03222-3, "Chip Multilayer Ceramic Capacitors for General Purpose, 0805, 22uF, X5R, 15%, 20%, 25V", Capacitance=22uF, Case Code (Imperial)=0805, Case Code (Metric)=2012, Dielectric=X5R, Max Operating Temperature=85°C, Min Operating Temperature=-55°C, Package Quantity=3000, Resistor Type=Ceramic, Tolerance=20%, Voltage=25V, Case/Package=0805, Depth=1.25mm, Height=1.25mm, Lead Free="Lead Free", Length=2mm, Material=Ceramic, Mount="Surface Mount", Packaging="Tape and Reel", REACH SVHC="No SVHC", Termination=SMD/SMT, Thickness=0.057inch, Voltage Rating=25V, Voltage Rating (DC)=25V, Weight=0.000335oz, Width=1.25mm
C46 C47 C83 C84: library part CMP-04427-001121-1, "General Purpose Ceramic Capacitor, 2220, 470nF, 10%, X7R, 15%, 100V", Capacitance=470nF, Case Code (Imperial)=2220, Case Code (Metric)=5750, Dielectric=X7R, Max Operating Temperature=125°C, Min Operating Temperature=-55°C, Tolerance=10%, Voltage Rating=100V, Case/Package=2220, Construction=Flat, Depth=5mm, Height=1.52mm, Lead Free="Lead Free", Length=5.7mm, Mount="Surface Mount", Number of Pins=2, Packaging="Tape and Reel", Radiation Hardening=No, REACH SVHC="No SVHC", RoHS Compliant=Yes, Termination=SMD/SMT, Voltage Rating (DC)=100V, Weight=0.016932oz, Width=5mm
C48 C85: library part CMP-2000-05860-2, "General Purpose Ceramic Capacitor, 1206, 1nF, 10%, X7R, 15%, 100V", Capacitance=1nF, Case Code (Imperial)=1206, Case Code (Metric)=3216, Dielectric=X7R, Dielectric Material=Ceramic, Insulation Resistance=100GR, Max Operating Temperature=125°C, Min Operating Temperature=-55°C, Package Quantity=1, Tolerance=10%, Voltage=63V, Voltage Rating=100V, Case/Package=1206, Construction=Flat, Contact Plating=Tin, Depth=1.6mm, Dissipation Factor=2.5%, Height=0.94mm, Lead Free="Lead Free", Length=3.2mm, Mount="Surface Mount", Number of Pins=2, Packaging="Tape and Reel", Radiation Hardening=No, REACH SVHC="No SVHC", RoHS Compliant=Yes, Series=-, Size=0.94mm, Termination=SMD/SMT, Thickness=0.037inch, Voltage Rating (DC)=100V, Width=0.063inch
C53 C54 C55 C56 C57 C58 C68 C69 C70 C71 C72 C73: library part CMP-2000-07446-2, "Cap Ceramic 15uF 100V X7S 20% Pad SMD 2220 +125°C Automotive T/R", Capacitance=15uF, Case Code (Imperial)=2220, Case Code (Metric)=5750, Dielectric=X7S, Max Operating Temperature=125°C, Min Operating Temperature=-55°C, Package Quantity=1, Ratings=AEC-Q200, Tolerance=20%, Voltage Rating=100V, Case/Package=2220, Composition=Ceramic, Depth=5mm, Height=2.3mm, Lead Free="Lead Free", Length=5.7mm, Mount="Surface Mount", Packaging="Tape and Reel", REACH SVHC="No SVHC", Termination=SMD/SMT, Thickness=0.098inch, Voltage Rating (DC)=100V, Weight=0.016932oz, Width=0.197inch
C59 C60 C61 C62 C74 C75 C76 C102: library part CMP-08246-004290-1, "Multilayer Ceramic Capacitors 3.3uF ±10% 100V X7R SMD 2220", Capacitance=3.3uF, Case Code (Imperial)=2220, Case Code (Metric)=5750, Dielectric=X7R, Max Operating Temperature=125°C, Min Operating Temperature=-55°C, Package Quantity=1, Resistor Type=Ceramic, Tolerance=10%, Voltage=100V, Case/Package=2220, Depth=5mm, Height=2.3mm, Lead Free="Lead Free", Length=5.7mm, Mount="Surface Mount", Number of Pins=2, Packaging="Tape and Reel", RoHS Compliant=Yes, Series=C, Termination=SMD/SMT, Thickness=0.098inch, Voltage Rating=100V, Voltage Rating (DC)=100V, Weight=0.016932oz, Width=5mm
C64 C65 C110 C111: library part CMP-08246-005087-1, "CAP CER 22UF 50V X5R SMD", Capacitance=22uF, Case Code (Imperial)=2220, Case Code (Metric)=5750, Case/Package=Ceramic, Dielectric=X5R, Max Operating Temperature=85°C, Min Operating Temperature=-55°C, Package Quantity=1, Tolerance=20%, Voltage=50V, Depth=5mm, Height=5mm, Lead Free="Lead Free", Lead/Base Style=L-Lead, Length=6mm, Mount="Surface Mount", Number of Pins=2, Packaging="Tape and Reel", Radiation Hardening=No, REACH SVHC="No SVHC", Resistor Type=Ceramic, RoHS Compliant=Yes, Series=CKG, Termination=Metal, Thickness=0.217inch, Voltage Rating=50V, Voltage Rating (DC)=50V, Width=5mm
C66 C89 C90 C93 C94: library part CMP-14477-002774-2, "None", Capacitance=1uF, Case Code (Imperial)=1210, Case Code (Metric)=3225, Dielectric=X5R, Max Operating Temperature=125°C, Min Operating Temperature=-55°C, Package Quantity=1, Resistor Type=Ceramic, Tolerance=10%, Voltage=100V, Case/Package=1210, Construction=Flat, Depth=2.5mm, Halogen Free="Halogen Free", Height=1.9mm, Length=3.2mm, Mount="Surface Mount", Number of Pins=2, Packaging="Tape and Reel", Radiation Hardening=No, REACH SVHC="No SVHC", RoHS Compliant=Yes, Series=M, Termination=SMD/SMT, Thickness=0.083inch, Voltage Rating=100V, Voltage Rating (DC)=100V, Width=2.5mm
C78 C86: library part CMP-2007-00259-2, "CAP CER 10000PF 200V X7R 0805", Capacitance="10,000 pF", Manufacturer=KEMET, Package=C0805C-DN, Temperature="-55°C to +125°C", Temperature Characteristic=X7R, Temperature Coefficient=30ppm/°C, Temperature Range High=+125°C, Temperature Range Low=-55°C, Tolerance=0.1, Voltage Rating="200 V", Automotive=No, Category=Cap, ComponentLink2Description=Datasheet, ComponentLink2URL=https://content.kemet.com/datasheets/KEM_C1003_C0G_SMD.pdf, Device Class L1="Passive Components", Device Class L2=Capacitors, Device Class L3="Ceramic Capacitors", Digikey Description="CAP CER 10000PF 200V X7R 0805", Height=0.88mm, Ipc Land Pattern Name=CAPC200125X78, Lead Free=Yes, Manufacturer Part Number=C0805C103K2RACTU, Material=Ceramic, Mouser Description="KEMET - C0805C103K2RACTU - CAP, MLCC, X7R, 10NF, 200V, 0805", Octopart=https://octopart.com/c0805c103k2ractu-kemet-9138347, RoHS=TRUE
C88 C92: library part CMP-001-00064-1, "Aluminum Electrolytic Capacitor, Polarized, Aluminum (wet), 100V, 20% +Tol, 20% -Tol, 470uF, Surface Mount, 7171", Capacitor Type=Aluminium, Case/Package=7171, Max Operating Temperature=105°C, Min Operating Temperature=-40°C, Pins=2, RoHS Compliant=Yes
C96 C118: library part CMP-2000-05477-2, "General Purpose Ceramic Capacitor, 1210, 10uF, 10%, X5R, 15%, 25V", Capacitance=10uF, Case Code (Imperial)=1210, Case Code (Metric)=3225, Dielectric=X5R, Max Operating Temperature=85°C, Min Operating Temperature=-55°C, Package Quantity=1, Tolerance=10%, Voltage=25V, Case/Package=1210, Construction=Flat, Contact Plating=Tin, Depth=2.5mm, Height=2.29mm, Lead Free="Lead Free", Length=3.2mm, Mount="Surface Mount", Packaging="Tape and Reel", Radiation Hardening=No, REACH SVHC="No SVHC", RoHS Compliant=Yes, Series=-, Termination=SMD/SMT, Thickness=0.11inch, Voltage Rating=25V, Voltage Rating (DC)=25V, Width=0.098inch
D1: library part CMP-1060-00565-1, "Zener Voltage Regulator, 500 mW, 2-Pin SOD-123, Pb-Free, Tape and Reel", Manufacturer="On Semiconductor", ComponentLink1Description="Manufacturer URL", ComponentLink1URL=http://www.onsemi.com/, ComponentLink2Description=Datasheet, ComponentLink2URL=http://www.onsemi.com/pub_link/Collateral/MMSZ5221BT1-D.PDF, ComponentLink3Description="Package Specification", ComponentLink3URL=http://www.onsemi.com/pub_link/Collateral/425-04.PDF, DatasheetVersion="Rev. 12", Mounting Technology="Surface Mount", P Max (W)=0.5, PackageDescription="2-Pin SOD, Body 1.6 x 2.69 mm", PackageReference=SOD-123-2-425-04, PackageVersion="Rev. G, 10/2009", Packing="Tape and Reel", PartNumber=MMSZ5242BT1G, RoHS=Pb-Free, VZ Typ (V)=12
D2: library part CMP-2000-04993-2, "DIODE GEN PURP 100V 150MA SOD123", Average Rectified Current=150mA, Capacitance=4pF, Forward Voltage=1V, Max Forward Surge Current (Ifsm)=1A, Max Operating Temperature=150°C, Max Repetitive Reverse Voltage (Vrrm)=100V, Max Reverse Leakage Current=5uA, Max Surge Current=2A, Min Operating Temperature=-65°C, Package Quantity=3000, Power Dissipation=400mW, Current Rating=150mA, Element Configuration=Single, Forward Current=150mA, Height=1.2mm, Lead Free="Lead Free", Length=2.85mm, Max Reverse Voltage (DC)=100V, Mount="Surface Mount", Number of Pins=2, Output Current=150mA, Packaging="Tape and Reel", Peak Non-Repetitive Surge Current=2A, Polarity=Standard, Radiation Hardening=No, Recovery Time=4ns, Reverse Recovery Time=4ns, Voltage Rating (DC)=100V, Width=1.8mm
D3: library part CMP-12225-000055-1, "TVS DIODE 26.5V 44V SOT323-3", Breakdown Voltage=28.5V, Capacitance=3pF, Clamping Voltage=44V, Manufacturer=STMicroelectronics, Max Junction Temp=+175°C, Package=SOT323-3L, Peak Pulse Current=3A, Peak Pulse Power=170W, Reverse Standoff Voltage=26.5V, Temperature="-55°C to +175°C", Temperature Range Low=-55°C, Automotive=Yes, Automotive Grade="Grade 0", Category=Diode, ComponentLink2Description=Datasheet, ComponentLink2URL=https://www.st.com/resource/en/datasheet/esdcan02-2bwy.pdf, Device Class L1="Circuit Protection", Device Class L2="TVS Diodes", Device Class L3=unset, Digikey Description="TVS DIODE 26.5V 44V SOT323-3", Direction=Bidirectional, Height=1.1mm, Ipc Land Pattern Name=SOT65P210X95-3, Lead Free=Yes, Manufacturer Part Number=ESDCAN02-2BWY, Mouser Description="TVS Diodes / ESD Suppressors Automotive dual-line Transil, Transient voltage suppressor (TVS) for CAN bus", Number of Channels=2, Octopart=https://octopart.com/esdcan02-2bwy-stmicroelectronics-58631133, RoHS=TRUE, Standoff Height=0mm, Temperature Range High=+175°C
D4 D5: library part CMP-004-00040-2, "Led, Red/Grn, 180Mcd/230Mcd, 624Nm/525Nm Rohs Compliant: Yes", Component Type=Standard, Design Item ID=CMP-004-00034-2, Pins=4, Source=rgled.SchLib
D6_PWR_PROT_1 D6_PWR_PROT_2 D6_PWR_PROT_3 D6_PWR_PROT_4 D6_PWR_PROT_5 D23 D45 D46 D47: library part CMP-1060-00750-1, "Zener Voltage Regulator, 500 mW, 2-Pin SOD-523, Pb-Free, Tape and Reel", Manufacturer="On Semiconductor", PartNumber=MM5Z3V3T1G, ComponentLink1Description="Manufacturer URL", ComponentLink1URL=http://www.onsemi.com/, ComponentLink2Description=Datasheet, ComponentLink2URL=http://www.onsemi.cn/pub_link/Collateral/MM5Z2V4T1-D.PDF, ComponentLink3Description="Package Specification", ComponentLink3URL=http://www.onsemi.com/pub_link/Collateral/502-01.PDF, DatasheetVersion="Rev. 10", Mounting Technology="Surface Mount", P Max (W)=0.5, PackageDescription="2-Pin SOD, Body 1.2 x 0.8 mm", PackageReference=SOD-523-2-502-01, PackageVersion="Rev. E, 09/2010", Packing="Tape and Reel", RoHS=Pb-Free, VZ Typ (V)=3.3
D7_BYPASS_0 D7_BYPASS_1 D7_BYPASS_2 D7_BYPASS_3: library part CMP-004-00058-2, "Rectifier Diode, Schottky, 1 Phase, 1 Element, 3A, 40V V(RRM), Silicon, DO-214AC", Forward Voltage=500mV, Max Operating Temperature=125°C, Pins=2, RoHS Compliant=Yes
D8 D9_IO_CHECKER_0 D9_IO_CHECKER_1 D10_IO_CHECKER_0 D10_IO_CHECKER_1 D11_IO_CHECKER_0 D11_IO_CHECKER_1 D12_IO_CHECKER_0 D12_IO_CHECKER_1 D13_IO_CHECKER_0 D13_IO_CHECKER_1 D14_IO_CHECKER_0 D14_IO_CHECKER_1 D15_IO_CHECKER_0 D15_IO_CHECKER_1 D16_IO_CHECKER_0 D16_IO_CHECKER_1 D17_IO_CHECKER_0 D17_IO_CHECKER_1 D18_IO_CHECKER_0 D18_IO_CHECKER_1 D19_IO_CHECKER_0 D19_IO_CHECKER_1 D20_IO_CHECKER_0 D20_IO_CHECKER_1 D21_IO_CHECKER_0 D21_IO_CHECKER_1 D22_IO_CHECKER_0 D22_IO_CHECKER_1 D26_ADC_0 D26_ADC_1 D27_ADC_0 D27_ADC_1 D28_ADC_0 D28_ADC_1 D29_ADC_0 D29_ADC_1 D30_ADC_0 D30_ADC_1 D31_ADC_0 D31_ADC_1 D32_ADC_0 D32_ADC_1 D33_ADC_0 D33_ADC_1 D34 D35 D36 D37 D38 D39 D40 D41_MOSFET_BANK_0 D41_MOSFET_BANK_1 D41_MOSFET_BANK_2 D41_MOSFET_BANK_3 D42_MOSFET_BANK_0 D42_MOSFET_BANK_1 D42_MOSFET_BANK_2 D42_MOSFET_BANK_3 D43_MOSFET_BANK_0 D43_MOSFET_BANK_1 D43_MOSFET_BANK_2 D43_MOSFET_BANK_3 D44_MOSFET_BANK_0 D44_MOSFET_BANK_1 D44_MOSFET_BANK_2 D44_MOSFET_BANK_3: library part CMP-1060-00750-1, "Zener Voltage Regulator, 500 mW, 2-Pin SOD-523, Pb-Free, Tape and Reel", Manufacturer="On Semiconductor", ComponentLink1Description="Manufacturer URL", ComponentLink1URL=http://www.onsemi.com/, ComponentLink2Description=Datasheet, ComponentLink2URL=http://www.onsemi.cn/pub_link/Collateral/MM5Z2V4T1-D.PDF, ComponentLink3Description="Package Specification", ComponentLink3URL=http://www.onsemi.com/pub_link/Collateral/502-01.PDF, DatasheetVersion="Rev. 10", Mounting Technology="Surface Mount", P Max (W)=0.5, PackageDescription="2-Pin SOD, Body 1.2 x 0.8 mm", PackageReference=SOD-523-2-502-01, PackageVersion="Rev. E, 09/2010", Packing="Tape and Reel", PartNumber=MM5Z3V3T1G, RoHS=Pb-Free, VZ Typ (V)=3.3
D24 D25: library part CMP-004-00060-2
F1: library part CMP-005-00028-2, "PTC Thermistor", RoHS Compliant=Yes
F2_MOSFET_BANK_0 F2_MOSFET_BANK_1 F2_MOSFET_BANK_2 F2_MOSFET_BANK_3 F3_MOSFET_BANK_0 F3_MOSFET_BANK_1 F3_MOSFET_BANK_2 F3_MOSFET_BANK_3 F4_MOSFET_BANK_0 F4_MOSFET_BANK_1 F4_MOSFET_BANK_2 F4_MOSFET_BANK_3 F5_MOSFET_BANK_0 F5_MOSFET_BANK_1 F5_MOSFET_BANK_2 F5_MOSFET_BANK_3 F6_BYPASS_0 F6_BYPASS_1 F6_BYPASS_2 F6_BYPASS_3: library part CMP-08605-000054-1, "FUSE BOARD MNT 3A 32VAC/VDC 1206", Fuse Current=3A, Fuse Interrupt Ac Current=50A, Fuse Voltage Drop=75.99mV, Manufacturer=Littelfuse, Max Fuse Ac Voltage=32V, Package=0466, Resistance=0.019Ω, Temperature="-55°C to +90°C", Temperature Range High=+90°C, Temperature Range Low=-55°C, Automotive=No, Category=Fuse, ComponentLink2Description=Datasheet, ComponentLink2URL=https://www.littelfuse.com/~/media/electronics/datasheets/fuses/littelfuse_fuse_466_datasheet.pdf.pdf, Device Class L1="Circuit Protection", Device Class L2=Fuses, Device Class L3=unset, Digikey Description="FUSE BOARD MNT 3A 32VAC/VDC 1206", Fuse Blow Speed=Fast, Fuse I2T=0.576A2Sec, Fuse Interrupt Dc Current=50A, Height=0.66mm, Lead Free=Yes, Manufacturer Part Number=0466003.NR, Max Fuse Dc Voltage=32V, Mouser Description="Surface Mount Fuses 32V 3A VFA Slimline", Octopart=https://octopart.com/0466003.nr-littelfuse-565175, RoHS=TRUE, Voltage Rating=32V
F7 F8 F9 F11 F13: library part CMP-07400-000005-1, "PTC RESET FUSE 9V 200MA 0805", Ambient Temperature Range High=+85°C, Ambient Temperature Range Low=-40°C, Current Rating=40A, Hold Current=0.2A, Manufacturer=Bourns, Package=MF-PSMF, Resistance=0.65-3.5Ω, Temperature="-40°C to +85°C", Trip Current=0.5A, Voltage Rating=9V, Automotive=No, Category=Fuse, ComponentLink2Description=Datasheet, ComponentLink2URL=https://www.bourns.com/docs/Product-Datasheets/mfpsmf.pdf, Device Class L1="Circuit Protection", Device Class L2="PTC Resettable Fuses", Device Class L3=unset, Digikey Description="PTC RESET FUSE 9V 200MA 0805", Height=0.85mm, Lead Free=Yes, Manufacturer Part Number=MF-PSMF020X-2, Mouser Description="PTC Resettable Fuse 0.2A(hold) 0.5A(trip) 9V 40A 0.5W 0.02s 0.65Ohm SMD Solder Pad 0805 T/R", Octopart=https://octopart.com/mf-psmf020x-2-bourns-7483437, RoHS=TRUE, Temperature Range High=+85°C, Temperature Range Low=-40°C, Trip Time=0.02s
FB1: library part CMP-0686-00252-4, "Chip Ferrite Bead, 0402, 600Ω @ 100MHz, 0.23Ω, 25%, 900mA", Case Code (Imperial)=0402, Case Code (Metric)=1005, Current Rating=900mA, DC Resistance (DCR)=230mR, Max Operating Temperature=125°C, Min Operating Temperature=-55°C, Package Quantity=10000, Test Frequency=100MHz, Tolerance=25%, Case/Package=0402, Height=0.5mm, Impedance=600R, Lead Free="Lead Free", Length=1mm, Material=Steel, Max Current Rating=900mA, Max DC Current=900mA, Number of Circuits=1, Number of Lines=1, Number of Pins=2, Packaging="Tape and Reel", Termination=SMD/SMT, Width=0.5mm
J1 J2: library part CMP-03369-000154-1, "CONN HEADER R/A 35POS 4MM", Color=Black, Current Rating=17A, Flammability Rating="UL94 V-0", Max Operating Temperature=221°C, Max Voltage Rating (AC)=250V, Min Operating Temperature=-40°C, Package Quantity=1, Circuit Application=Power, Connector System=Wire-to-Device, Connector Type="Male Pin", Contact Material=Brass, Contact Plating=Tin, Contact Type="Male Pin", Depth=37.9mm, ELV=Compliant, Fastening Type=Ramp, Gender=Male, Height=32.1mm, Housing Material=Thermoplastic, Insulation=Insulated, Lead Free="Lead Free", Length=3.03inch, Mount="Through Hole", Number of Contacts=35, Number of Positions=35, Number of Rows=3, Number of Signal Positions=35, Orientation="Right Angle", Packaging=Bulk, PCB Mount Alignment="Yes (With)", PCB Mount Retention=With, PCB Thickness=0.062inch, Pitch=0.157inch, Primary Type=Rectangular, Radiation Hardening=No, RoHS Compliant=Yes, Row Spacing=0.157inch, Sealable="Yes (With)", Series=Ampseal, Shielding=Unshielded, Tab Thickness=1.3mm, Termination=Solder, Width=37.9mm
J4: library part CMP-001-0013-3, "CONN HEADER SMD 10POS 1.27MM"
L1: library part CMP-07251-000006-1, "CMC 51UH 200MA 2LN 2KOHM SMD", Case/Package=4532, Current=200mA, DC Resistance (DCR)=3.5R, Inductance=51uH, Insulation Resistance=10MR, Max Operating Temperature=125°C, Min Operating Temperature=-40°C, Package Quantity=1, Resistance=2kR, Self Resonant Frequency=100kHz, Tolerance=50%, Voltage Rating (DC)=50V, Contact Plating=Tin, Core Material=Ferrite, Current Rating=200mA, DC Current=200mA, Depth=3.4mm, Element Configuration=Dual, Height=0.118inch, Impedance=2kR, Lead Free="Lead Free", Length=4.5mm, Material=Steel, Max DC Current=200mA, Mount="Surface Mount", Number of Lines=2, Packaging="Tape and Reel", REACH SVHC="No SVHC", RoHS Compliant=Yes, Series=SRF4532, Termination=SMD/SMT, Test Frequency=100kHz, Width=0.126inch
L2 L4: library part CMP-0226-00001-2, Ambient Temperature Range High=100°C, Ambient Temperature Range Low=-40°C, DC Resistance (DCR)=6.9mΩ, Inductance=10µH, Inductance Tolerance=20%, Max Operating Temperature=150°C, Saturation Current=10A, Self Resonant Frequency=14MHz, Height=8.9mm, Length=18.3mm, Min Operating Temperature=-40°C, NexarPartId=22803350, Number of Pins=2, Packaging="Cut Tape (CT)", RoHS=Compliant, Width=18.2mm
L3: library part CMP-006-00032-1, "High Current Composite Inductor - PA5433.XXXNLT and PM5433.XXXNLT"
L5: library part CMP-14484-001014-1, "SMD Power Inductors 4.7uH ±30% 3.1A 37.7mΩ", Case/Package=Nonstandard, Current Rating=3.1A, DC Resistance (DCR)=37.7mR, Inductance=4.7uH, Inductance Tolerance=30%, Max DC Current=3.3A, Max Operating Temperature=120°C, Min Operating Temperature=-25°C, Package Quantity=1500, Resistor Type=Wirewound, Self Resonant Frequency=28MHz, Test Frequency=100kHz, Core Material=Ferrite, Depth=5.1mm, Halogen Free="Halogen Free", Height=4mm, Height - Seated (Max)=0.161inch, Length=0.193inch, Mount="Surface Mount", Number of Pins=2, Packaging="Tape and Reel", Radiation Hardening=No, RMS Current (Irms)=3.1A, RoHS Compliant=Yes, Saturation Current=3.3A, Series=NR, Shielding=Shielded, Termination=SMD/SMT, Tolerance=30%, Width=4.9mm
Q1 Q2 Q3 Q4 Q7_BYPASS_0 Q7_BYPASS_1 Q7_BYPASS_2 Q7_BYPASS_3: library part CMP-013-00018-2, "Trans MOSFET P-CH 20V 22.1A 8-Pin PowerPAK 1212 EP T/R", Component Type=Standard, Design Item ID=CMP-013-00036-4, Pins=5, Source=SISH615ADN-T1-GE3.SchLib
Q5: library part CMP-2000-05968-1, "N-Channel Enhancement Mode Mosfet, 50 V, 200 mA, -55 to 150 degC, 6-Pin SOT-323, RoHS, Tape and Reel", Id - Continuous Drain Current=200mA, Manufacturer=DiodesIncorporated, Maximum Operating Temperature=+150C, Minimum Operating Temperature=-55C, Package / Case=SOT-323-3, Package Description="3-Pin Small Outline Transistor, Body 2 x 1.25 mm, Pitch 0.65 mm", Package Reference=SOT323, Pd - Power Dissipation=200mW, Rds On - Drain-Source Resistance=1.4Ohms, Vds - Drain-Source Breakdown Voltage=75V, Vgs - Gate-Source Voltage=20V, Brand=DiodesIncorporated, Channel Mode=Enhancement, Configuration=Single, Datasheet URL=http://www.diodes.com/_files/datasheets/ds30206.pdf, Datasheet Version="Rev. 11-2, 09/2013", Factory Pack Quantity=3000, Forward Transconductance - Min=0.1S, Height=1mm, Length=2.2mm, Manufacturer URL=http://www.diodes.com/, Mounting Style=SMD/SMT, Mounting Technology=SurfaceMount, Number of Channels=1Channel, Packaging=Reel, Product=MOSFETSmallSignal, Product Category=MOSFET, RoHS=True, Series=BSS138, Technology=Si, Transistor Polarity=N-Channel, Transistor Type=1N-Channel, Type=EnhancementModeFieldEffectTransistor, Typical Turn-Off Delay Time=20ns, Typical Turn-On Delay Time=20ns, Unit Weight=0.000212oz, Width=1.35mm
Q6 Q9: library part CMP-02550-000179-1, "MOSFET N-CH 150V 42A TO252AA", Continuous Drain Current=42A, Drain to Source Breakdown Voltage=150V, Drain to Source Resistance=0.0372Ω, Gate To Source Voltage=20V, Input Capacitace At Vds="560pF @ 50V", Manufacturer=Vishay, Max Forward Diode Voltage=1.5V, Max Junction Temp=+175°C, Package=T16-0236, Power Dissipation=65.2W, Pulse Drain Current=40A, Temperature="-55°C to +175°C", Temperature Range Low=-55°C, Typ Forward Diode Voltage=0.85V, Automotive=No, Category=Trans, ComponentLink2Description=Datasheet, ComponentLink2URL=https://www.vishay.com/docs/76248/sud80460e.pdf, Depletion Mode=False, Device Class L1="Discrete Semiconductors", Device Class L2=Transistors, Device Class L3=MOSFETs, Digikey Description="MOSFET N-CH 150V 42A TO252AA", Drain To Source Voltage=150V, Footprint Url=https://www.vishay.com/docs/71197/to252aa.pdf, Gate Charge At Vgs="10.5nC @ 10V", Height=2.507mm, Lead Free=Yes, Manufacturer Part Number=SUD80460E-GE3, Number of Channels=1, Number Of N Channels=1, Octopart=https://octopart.com/sud80460e-ge3-vishay-78440626, Reverse Recovery Charge=210nC, Reverse Recovery Time=68ns, RoHS=TRUE, Rthja Max=50°C/W, Temperature Range High=+175°C, Threshold Vgs Max=4V, Threshold Vgs Min=2V, Transconductance=11S, Turn Off Delay Time=15ns, Turn On Delay Time=8ns
Q8_BYPASS_0 Q8_BYPASS_1 Q8_BYPASS_2 Q8_BYPASS_3: library part CMP-35916-000023-1, "SMALL-SIGNAL MOSFET 2 IN 1 NCH +"
R1_MOSFET_BANK_0 R1_MOSFET_BANK_1 R1_MOSFET_BANK_2 R1_MOSFET_BANK_3 R2_MOSFET_BANK_0 R2_MOSFET_BANK_1 R2_MOSFET_BANK_2 R2_MOSFET_BANK_3 R3_MOSFET_BANK_0 R3_MOSFET_BANK_1 R3_MOSFET_BANK_2 R3_MOSFET_BANK_3 R4_MOSFET_BANK_0 R4_MOSFET_BANK_1 R4_MOSFET_BANK_2 R4_MOSFET_BANK_3 R5_MOSFET_BANK_0 R5_MOSFET_BANK_1 R5_MOSFET_BANK_2 R5_MOSFET_BANK_3 R6_MOSFET_BANK_0 R6_MOSFET_BANK_1 R6_MOSFET_BANK_2 R6_MOSFET_BANK_3 R7_MOSFET_BANK_0 R7_MOSFET_BANK_1 R7_MOSFET_BANK_2 R7_MOSFET_BANK_3 R8_MOSFET_BANK_0 R8_MOSFET_BANK_1 R8_MOSFET_BANK_2 R8_MOSFET_BANK_3 R9 R10 R12_MOSFET_BANK_0 R12_MOSFET_BANK_1 R12_MOSFET_BANK_2 R12_MOSFET_BANK_3 R13_MOSFET_BANK_0 R13_MOSFET_BANK_1 R13_MOSFET_BANK_2 R13_MOSFET_BANK_3 R14_MOSFET_BANK_0 R14_MOSFET_BANK_1 R14_MOSFET_BANK_2 R14_MOSFET_BANK_3 R15_MOSFET_BANK_0 R15_MOSFET_BANK_1 R15_MOSFET_BANK_2 R15_MOSFET_BANK_3 R16_MOSFET_BANK_0 R16_MOSFET_BANK_1 R16_MOSFET_BANK_2 R16_MOSFET_BANK_3 R17_MOSFET_BANK_0 R17_MOSFET_BANK_1 R17_MOSFET_BANK_2 R17_MOSFET_BANK_3 R18_MOSFET_BANK_0 R18_MOSFET_BANK_1 R18_MOSFET_BANK_2 R18_MOSFET_BANK_3 R19_MOSFET_BANK_0 R19_MOSFET_BANK_1 R19_MOSFET_BANK_2 R19_MOSFET_BANK_3 R20_MOSFET_BANK_0 R20_MOSFET_BANK_1 R20_MOSFET_BANK_2 R20_MOSFET_BANK_3 R21_MOSFET_BANK_0 R21_MOSFET_BANK_1 R21_MOSFET_BANK_2 R21_MOSFET_BANK_3 R22_MOSFET_BANK_0 R22_MOSFET_BANK_1 R22_MOSFET_BANK_2 R22_MOSFET_BANK_3 R23_MOSFET_BANK_0 R23_MOSFET_BANK_1 R23_MOSFET_BANK_2 R23_MOSFET_BANK_3 R24_MOSFET_BANK_0 R24_MOSFET_BANK_1 R24_MOSFET_BANK_2 R24_MOSFET_BANK_3 R25_MOSFET_BANK_0 R25_MOSFET_BANK_1 R25_MOSFET_BANK_2 R25_MOSFET_BANK_3 R26 R27 R28 R29 R30 R31 R32 R33 R34 R35 R36 R37 R38 R39 R40 R41 R42 R43 R44 R45 R46 R47_PWR_PROT_1 R47_PWR_PROT_2 R47_PWR_PROT_3 R47_PWR_PROT_4 R47_PWR_PROT_5 R48 R49_PWR_PROT_1 R49_PWR_PROT_2 R49_PWR_PROT_3 R49_PWR_PROT_4 R49_PWR_PROT_5 R50_PWR_PROT_1 R50_PWR_PROT_2 R50_PWR_PROT_3 R50_PWR_PROT_4 R50_PWR_PROT_5 R51 R52_PWR_PROT_1 R52_PWR_PROT_2 R52_PWR_PROT_3 R52_PWR_PROT_4 R52_PWR_PROT_5 R53 R54_BYPASS_0 R54_BYPASS_1 R54_BYPASS_2 R54_BYPASS_3 R55_BYPASS_0 R55_BYPASS_1 R55_BYPASS_2 R55_BYPASS_3 R56_BYPASS_0 R56_BYPASS_1 R56_BYPASS_2 R56_BYPASS_3 R57_BYPASS_0 R57_BYPASS_1 R57_BYPASS_2 R57_BYPASS_3 R58_BYPASS_0 R58_BYPASS_1 R58_BYPASS_2 R58_BYPASS_3 R59_BYPASS_0 R59_BYPASS_1 R59_BYPASS_2 R59_BYPASS_3 R60_ADC_0 R60_ADC_1 R63 R65 R67 R68 R69 R70 R71 R86 R87 R88 R90 R92 R93 R94 R95_IO_CHECKER_0 R95_IO_CHECKER_1 R96_IO_CHECKER_0 R96_IO_CHECKER_1 R97_IO_CHECKER_0 R97_IO_CHECKER_1 R105 R106 R107 R108 R109 R110 R111 R116 R119 R120 R121_IO_CHECKER_0 R121_IO_CHECKER_1 R122 R123 R124 R125 R126 R130 R131 R132 R133 R134 R135: library part CMP-009-00002-14, "Resistor"
R11_MOSFET_BANK_0 R11_MOSFET_BANK_1 R11_MOSFET_BANK_2 R11_MOSFET_BANK_3: library part CMP-2000-00869-1, Manufacturer=Panasonic, Part Number=ERT-J1VR103J